# Altium PCB 04-ADC_antialiasing.PcbDoc
Units mm, origin at the board's own origin, x right, y up, seen from the top; angles counter-clockwise.
Board outline 58 x 60 mm, 2 copper layers (Top Layer, Bottom Layer), stack 1.534 mm thick; 43 components, 33 nets, 126 pads, 12 vias.
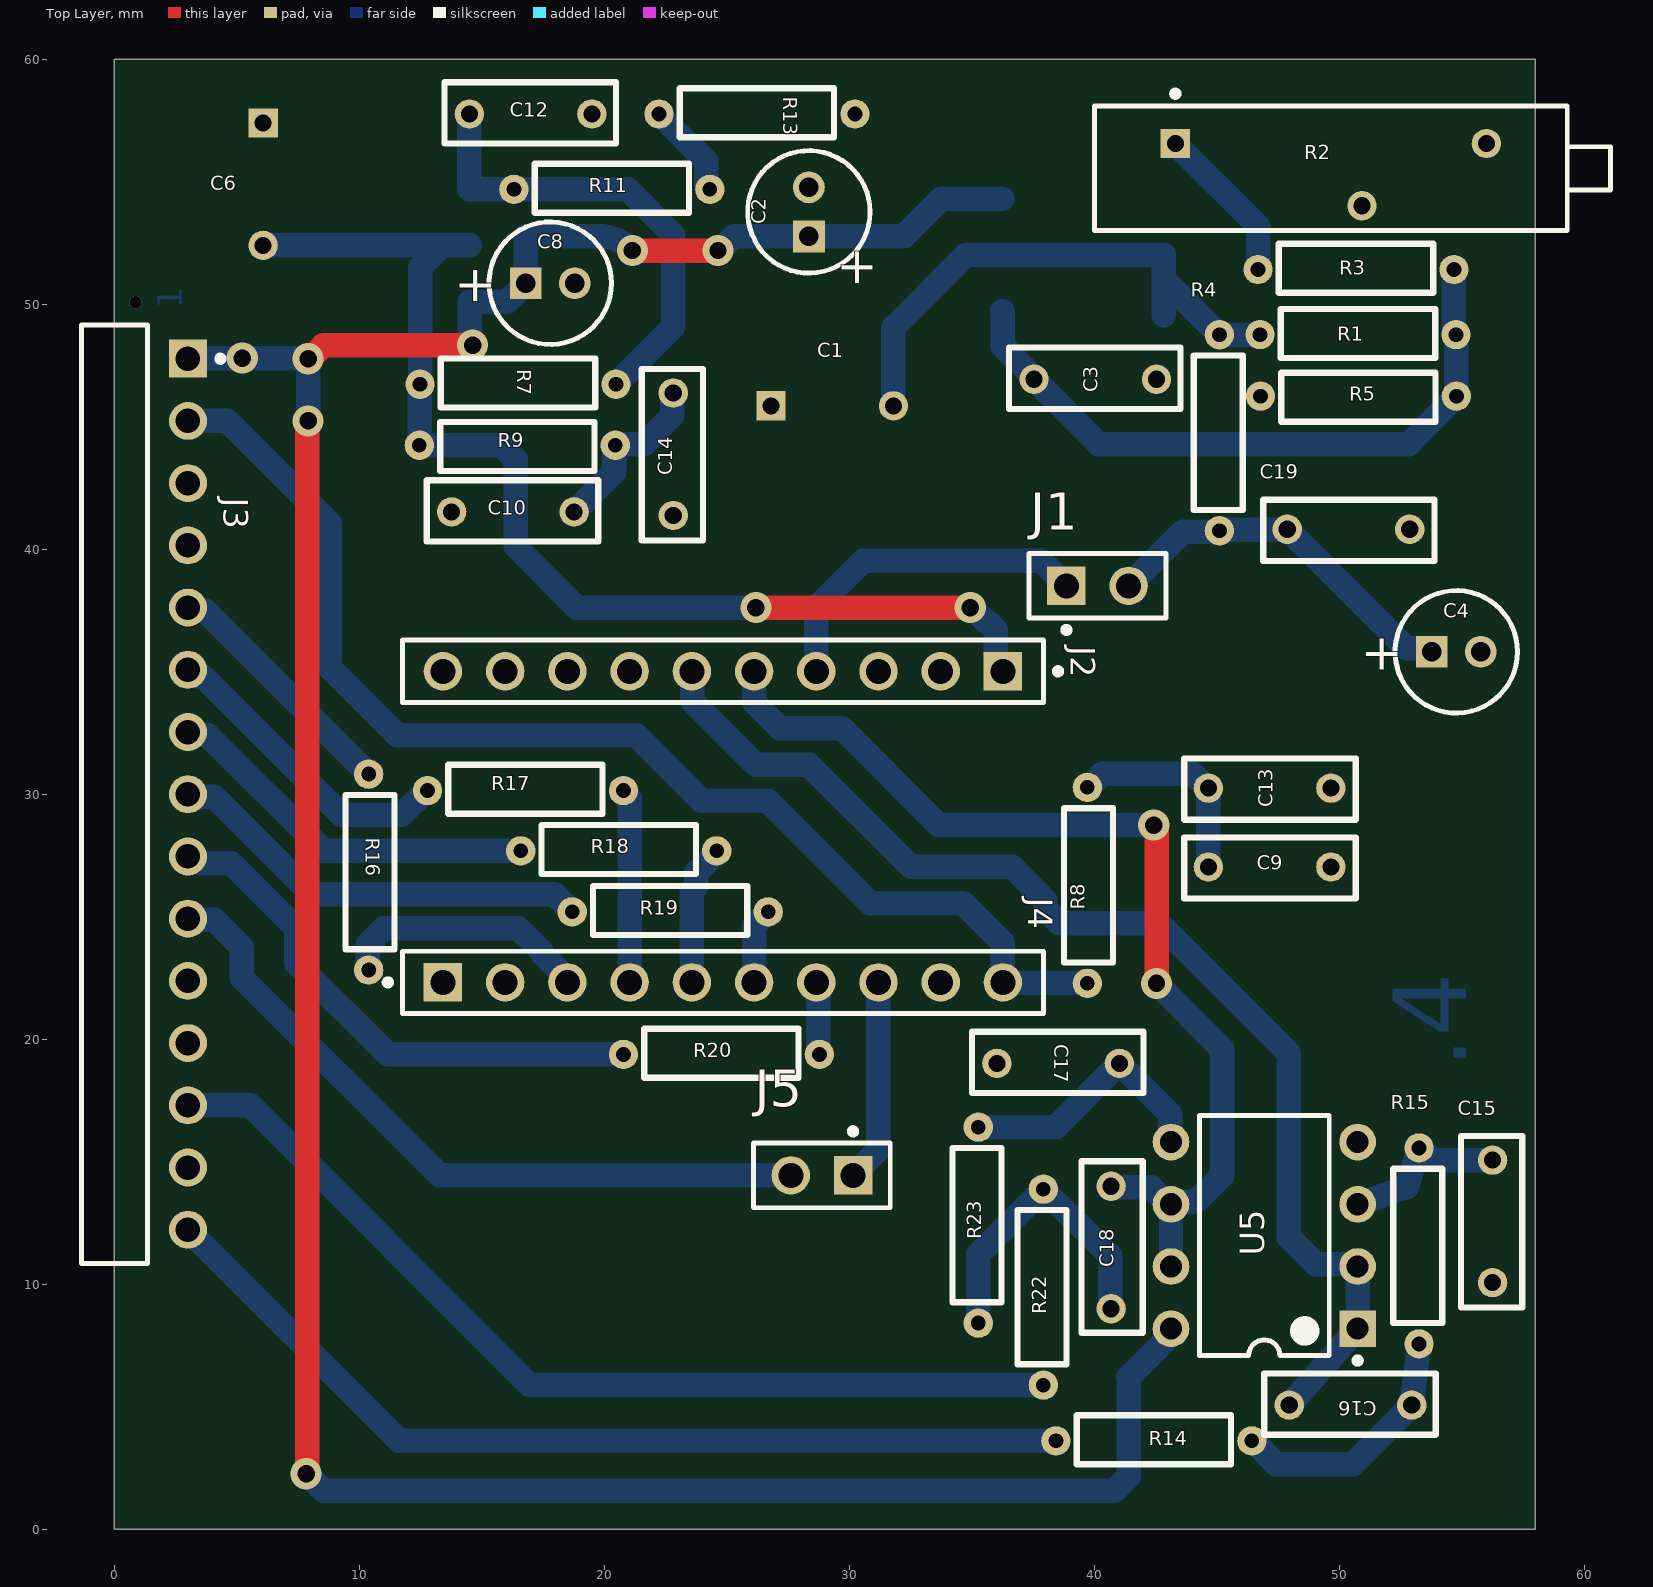
[diagram p0: Top Layer view]
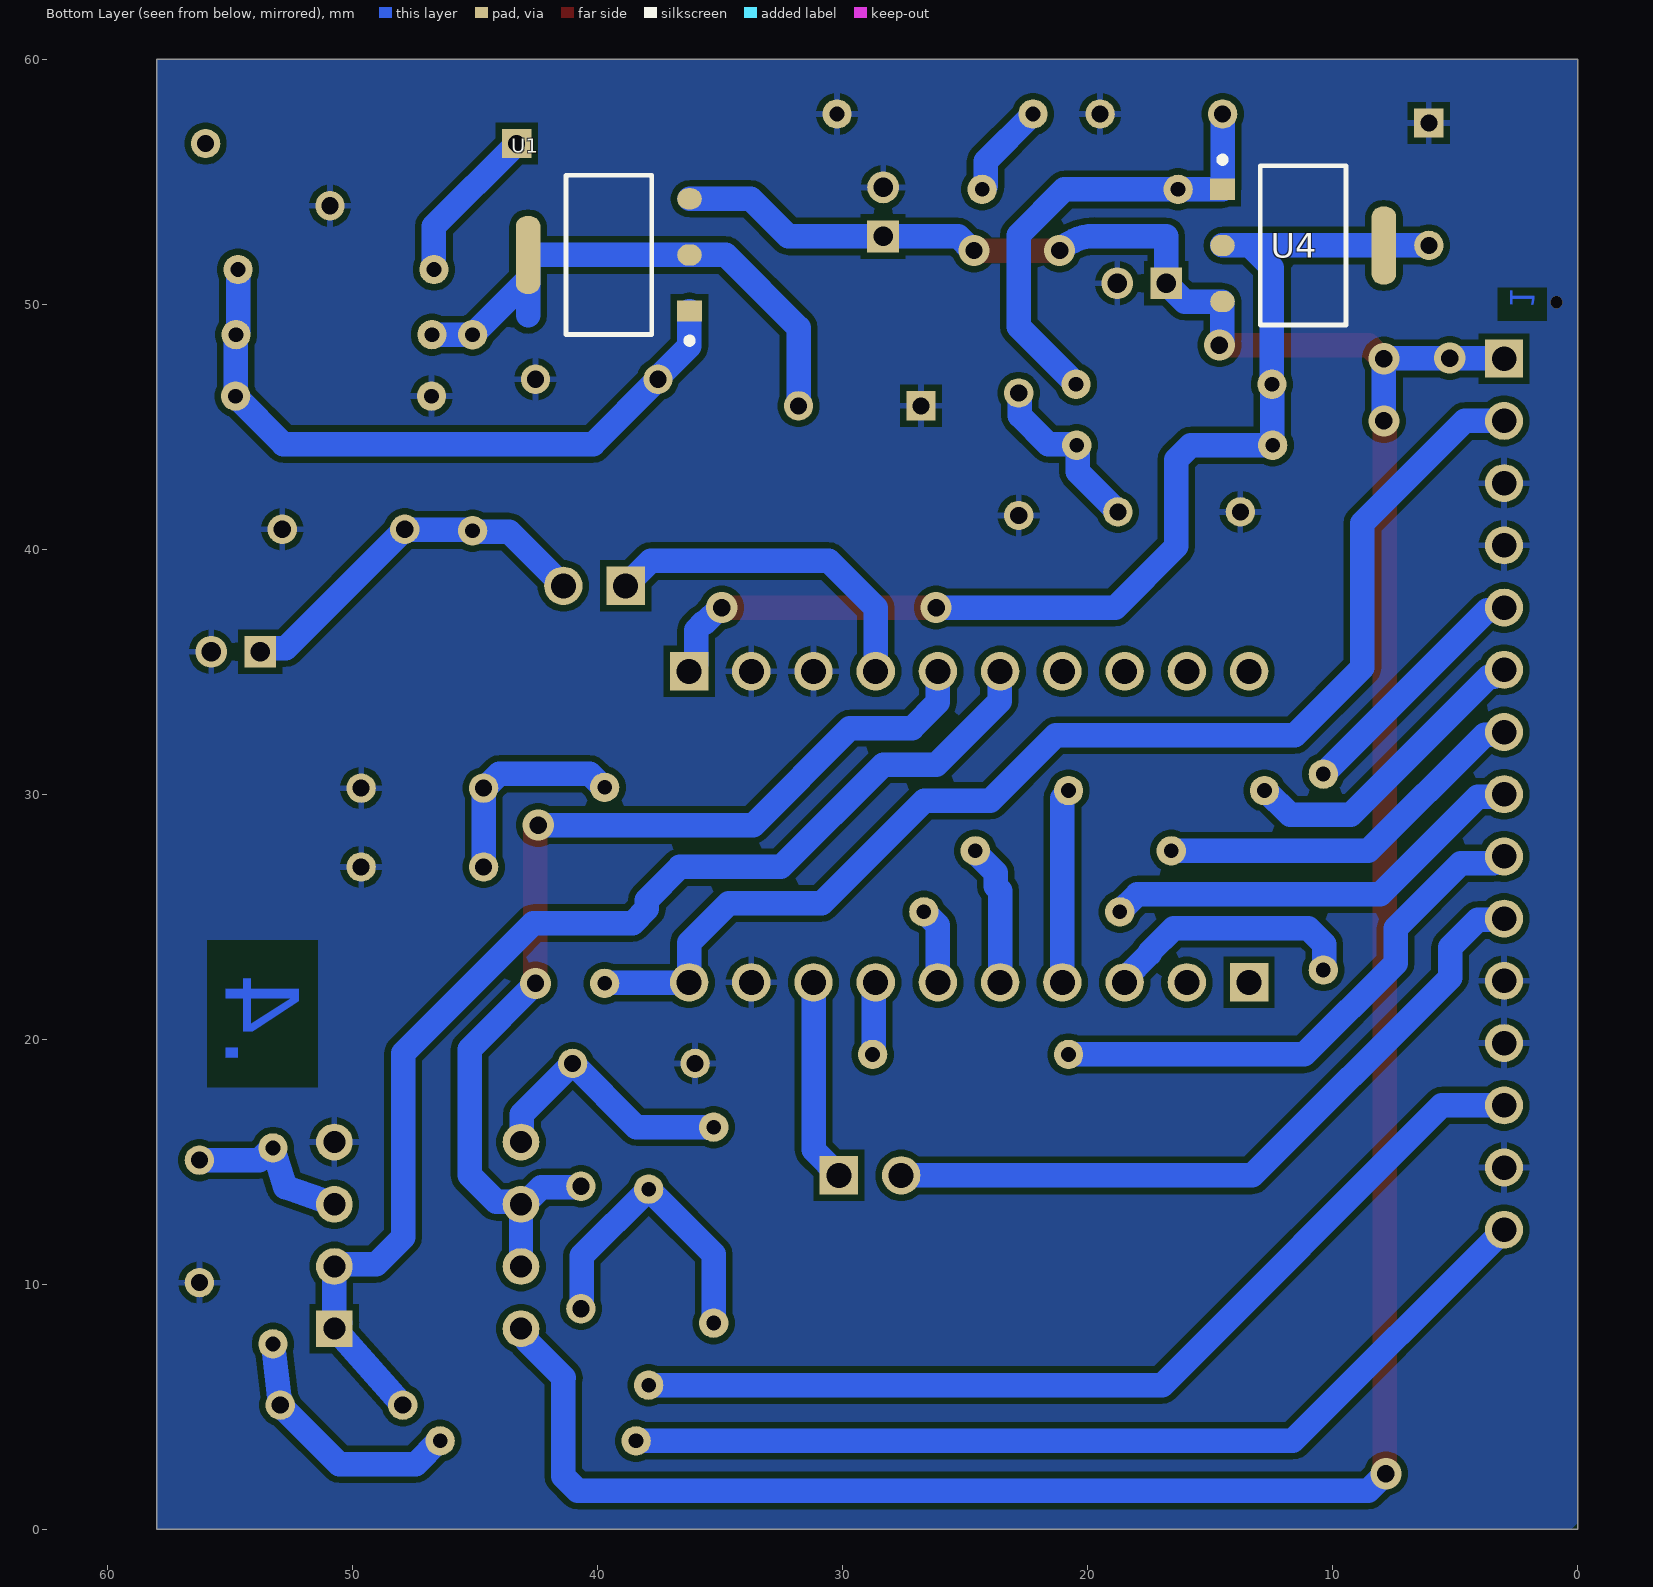
[diagram p1: Bottom Layer view, seen from below]

## Layer stack, top to bottom
Top Solder: solder mask 0.0127, Solder Resist, Dk 3.3
Top Layer: signal copper 0.0178
Dielectric1: core 1.4986, FR-4, Dk 4.3
Bottom Layer: signal copper 0.0178
Bottom Solder: solder mask 0.0127, Solder Resist, Dk 3.3

## Board outline
0,0 0,60 58,60 58,0

## Design rules (kind name [scope] priority, off if disabled: settings)
Clearance [All] p1: gap=0.254 ignorepadtopadclearanceinfootprint=FALSE except(0.1: Arc-Arc Arc-Track Arc-SMDPad Track-Track Track-SMDPad SMDPad-SMDPad)
DiffPairsRouting [All] p1: maxlimit=0.254 minlimit=0.254 mostfreqgap=0.254 toplayer_minwidth=0.254 toplayer_maxwidth=0.254 toplayer_prefwidth=0.254 bottomlayer_minwidth=0.254 bottomlayer_maxwidth=0.254 bottomlayer_prefwidth=0.254 maxuncoupledlength=12.7
HoleSize [All] p1: absolutevalues=TRUE maxlimit=7.62 minlimit=0.254 maxpercent=80.000 minpercent=20.000
MinimumAnnularRing [All] p1: minimumring=0.25
PasteMaskExpansion [All] p1: expansion=0.254
PlaneClearance [All] p1: clearance=0.381
PlaneConnect [All] p1: pad.planeconnectstyle=Relief pad.reliefexpansion=0.508 pad.reliefentries=4 pad.reliefconductorwidth=0.254 pad.reliefairgap=0.254 via.planeconnectstyle=Direct via.reliefexpansion=0.508 via.reliefentries=4 via.reliefconductorwidth=0.254 via.reliefairgap=0.254
PolygonConnect [All] p1: thpad.connectstyle=Relief thpad.reliefconductorwidth=0.254 thpad.reliefentries=4 thpad.polygonreliefangle="90 Angle" thpad.airgapwidth=0.254 smdpad.connectstyle=Relief smdpad.reliefconductorwidth=0.254 smdpad.reliefentries=4 smdpad.polygonreliefangle="90 Angle" smdpad.airgapwidth=0.254 via.connectstyle=Direct via.reliefconductorwidth=0.254 via.reliefentries=4 via.polygonreliefangle="90 Angle" via.airgapwidth=0.254
RoomDefinition 04-ADC_antialiasing [InComponentClass('04-ADC_antialiasing')] p1: confinementstyle=ConfineIn formatcopy=TRUE lockcomponents=FALSE outline -189.586,-112.446 -138.786,-112.446 -138.786,-87.046 -189.586,-87.046
RoutingVias [All] p1: holewidth=0.254 width=0.508 viastyle="Through Hole" minholewidth=0.25 minwidth=0.508 maxholewidth=0.254 maxwidth=0.508
SMDNeckDown [All] p1: percent=200.000
SilkToSolderMaskClearance SilkscreenOverComponentPads [IsPad] p1: minsilkscreentomaskgap=0.254 clearancetoexposedcopper=TRUE
SolderMaskExpansion [All] p1: expansion=0.254 istentingtop=FALSE
SupplyNets "Schematic Supply Nets_1" [InNet('GND')] p1: voltage=0.000
Width [All] p1: maxlimit=2 minlimit=0.254 preferedwidth=1 minimp=50.000000 maximp=50.000000 favimp=50.000000
24 further rules are at their usual default settings.

## Components (designator, comment, footprint, x,y, rotation, side; value= is the part's Value field where it differs from the comment)
C1 "Cap_Pol" Cap_Pol_1cm_5mmPads_15mmmHigh 31.804,45.856 r180 top value=220uF
C2 "ECA1HM100" CAPPR55-200-1100X500X1200 28.35,53.774 r90 top
C3 "Cap_6.0*2.5*6mm" Cap_6.0%2A2.5%2A6mm 37.542,46.94 r0 top value=100nF
C4 "ECA1HM100" CAPPR55-200-1100X500X1200 54.781,35.814 r0 top
C6 "Cap_Pol" Cap_Pol_1cm_5mmPads_15mmmHigh 6.071,52.404 r90 top value=220uF
C8 "ECA1HM100" CAPPR55-200-1100X500X1200 17.79,50.862 r0 top
C9 "Cap_5.0*2.5*6mm" Cap_6.0%2A2.5%2A6mm 49.659,27.029 r180 top value=100nF
C10 "Cap_5.0*2.5*6mm" Cap_6.0%2A2.5%2A6mm 13.765,41.525 r0 top value=100nF
C12 "Cap_6.0*2.5*6mm" Cap_6.0%2A2.5%2A6mm 14.492,57.77 r0 top value=100nF
C13 "Cap_5.0*2.5*6mm" Cap_6.0%2A2.5%2A6mm 49.659,30.248 r180 top value=100nF
C14 "Cap_5.0*2.5*6mm" Cap_6.0%2A2.5%2A6mm 22.815,41.38 r90 top value=100nF
C15 "Cap_6.0*2.5*6mm" Cap_6.0%2A2.5%2A6mm 56.263,10.061 r90 top value=330pF
C16 "Cap_6.0*2.5*6mm" Cap_6.0%2A2.5%2A6mm 47.961,5.06 r0 top value=1nF
C17 "Cap_6.0*2.5*6mm" Cap_6.0%2A2.5%2A6mm 36.026,19.011 r0 top value=330pF
C18 "Cap_6.0*2.5*6mm" Cap_6.0%2A2.5%2A6mm 40.687,13.996 r270 top value=1nF
C19 "Cap_5.0*2.5*6mm" Cap_6.0%2A2.5%2A6mm 52.879,40.816 r180 top value=100nF
J1 "M20-9990245" FP-M20-9990245-MFG 40.132,38.506 r0 top
J2 "SSQ-110-03-G-S" FP-SSQ-110-03-G-S-MFG 24.842,35.019 r180 top
J3 "90121-0775" FP-90121-0775-MFG 0,30 r270 top
J4 "SSQ-110-03-G-S" FP-SSQ-110-03-G-S-MFG 24.842,22.319 r0 top
J5 "M20-9990245" FP-M20-9990245-MFG 28.883,14.438 r180 top
R1 "Res_3.5x6.5mm_TH" Res_Axial_3.5x6.5mm_TH 46.768,48.764 r0 top value=2.2k
R2 "3006P-1-104LF" FP-3006P-1-104LF-MFG 50.546,55.55 r0 top
R3 "Res_3.5x6.5mm_TH" Res_Axial_3.5x6.5mm_TH 46.686,51.421 r0 top value=8.2k
R4 "Res_3.5x6.5mm_TH" Res_Axial_3.5x6.5mm_TH 45.11,40.759 r90 top value=10k
R5 "Res_3.5x6.5mm_TH" Res_Axial_3.5x6.5mm_TH 54.787,46.253 r180 top value=4.7k
R7 "Res_3.5x6.5mm_TH" Res_Axial_3.5x6.5mm_TH 12.475,46.737 r0 top value=220
R8 "Res_3.5x6.5mm_TH" Res_Axial_3.5x6.5mm_TH 39.72,30.279 r270 top value=10ohm
R9 "Res_3.5x6.5mm_TH" Res_Axial_3.5x6.5mm_TH 20.447,44.247 r180 top value=10ohm
R11 "Res_3.5x6.5mm_TH" Res_Axial_3.5x6.5mm_TH 16.309,54.693 r0 top value=270
R13 "Res_3.5x6.5mm_TH" Res_Axial_3.5x6.5mm_TH 22.231,57.77 r0 top value=100
R14 "Res_3.5x6.5mm_TH" Res_Axial_3.5x6.5mm_TH 38.436,3.601 r0 top value=10k
R15 "Res_3.5x6.5mm_TH" Res_Axial_3.5x6.5mm_TH 53.26,7.559 r90 top value=22K
R16 "Res_3.5x6.5mm_TH" Res_Axial_3.5x6.5mm_TH 10.379,30.823 r270 top value=1k
R17 "Res_3.5x6.5mm_TH" Res_Axial_3.5x6.5mm_TH 12.78,30.15 r0 top value=1k
R18 "Res_3.5x6.5mm_TH" Res_Axial_3.5x6.5mm_TH 16.587,27.689 r0 top value=1k
R19 "Res_3.5x6.5mm_TH" Res_Axial_3.5x6.5mm_TH 18.688,25.198 r0 top value=1k
R20 "Res_3.5x6.5mm_TH" Res_Axial_3.5x6.5mm_TH 20.78,19.376 r0 top value=1k
R22 "Res_3.5x6.5mm_TH" Res_Axial_3.5x6.5mm_TH 37.922,5.877 r90 top value=10k
R23 "Res_3.5x6.5mm_TH" Res_Axial_3.5x6.5mm_TH 35.267,8.409 r90 top value=22k
U1 "ams1117" FP-ams1117-IPC_C 39.549,52.016 r0 bottom
U4 "ams1117" FP-ams1117-IPC_C 11.201,52.403 r180 bottom
U5 "MCP6022-I/P" PDIP300-P8 46.944,11.99 r180 top

## Footprints (in the part's own frame and the unit in brackets; to place one, negate y for a bottom-side part, rotate by r counter-clockwise, add the part's x,y. Pads: shape width x height; smd on the part's side, far side on the other; paste and mask are expansions set on the pad)
Cap_6.0%2A2.5%2A6mm [mm]
  round 1.2 hole 0.7: 1(0,0) 2(5,0)
  silkscreen extent -1.02,-1.21 5.98,1.29, body extent -1.02,-1.21 5.98,1.29, height 6
Cap_Pol_1cm_5mmPads_15mmmHigh [mm]
  round 1.2 hole 0.7: 0(0,0)
  rect 1.2x1.2 hole 0.7: 1(5,0)
  body extent -2.57,-4.92 7.43,5.08, height 20
CAPPR55-200-1100X500X1200 [mm] "THD, 2-Leads, Dia 5mm, Body Length 11mm"
  rect 1.3x1.3 hole 0.8: 1(-1,0)
  round 1.3 hole 0.8: 2(1,0)
  silkscreen extent -2.5,-2.5 2.5,2.5, body extent -2.5,-2.5 2.5,2.5, height 12
FP-3006P-1-104LF-MFG [mm]
  rect 1.2x1.2 hole 0.7 paste-2539.97 mask+0: 1(-7.235,1.015)
  round 1.2 hole 0.7 paste-2539.97 mask+0: 2(0.385,-1.525) 3(5.465,1.015)
  silkscreen extent -10.54,-2.54 10.54,3.17, body extent -10.64,-2.64 10.64,2.64, height 0.25
FP-90121-0775-MFG [mm]
  rect 1.55x1.55 hole 1 paste-2539.97 mask+0: 1(-17.78,3)
  round 1.55 hole 1 paste-2539.97 mask+0: 2(-15.24,3) 3(-12.7,3) 4(-10.16,3) 5(-7.62,3) 6(-5.08,3) 7(-2.54,3) 8(0,3) 9(2.54,3) 10(5.08,3) 11(7.62,3) 12(10.16,3) 13(12.7,3) 14(15.24,3) 15(17.78,3)
  silkscreen extent -19.15,-1.35 19.15,4.45, body extent -19.25,-8.4 19.25,3.88, height 0.25
FP-ams1117-IPC_C [mm]
  rect 1.004x0.872 smd paste+0 mask+0: 1(-3.295,2.29)
  rrect100% 1.004x0.872 smd paste+0 mask+0: 2(-3.295,0) 3(-3.295,-2.29)
  rrect87% 1.004x3.182 smd paste+0 mask+0: 4(3.295,0)
  silkscreen extent -3.42,-3.25 1.75,3.62, body extent -3.5,-3.25 3.5,3.25, height 1.8
FP-M20-9990245-MFG [mm]
  rect 1.57x1.57 hole 1.02 paste-2539.97 mask+0: 1(-1.27,0)
  round 1.57 hole 1.02 paste-2539.97 mask+0: 2(1.27,0)
  silkscreen extent -2.79,-1.92 2.79,1.32, body extent -2.89,-1.42 2.89,1.42, height 0.25
FP-SSQ-110-03-G-S-MFG [mm]
  rect 1.57x1.57 hole 1.02 paste-2539.97 mask+0: 1(-11.43,0)
  round 1.57 hole 1.02 paste-2539.97 mask+0: 2(-8.89,0) 3(-6.35,0) 4(-3.81,0) 5(-1.27,0) 6(1.27,0) 7(3.81,0) 8(6.35,0) 9(8.89,0) 10(11.43,0)
  silkscreen extent -13.81,-1.27 13.08,1.27, body extent -13.18,-1.37 13.18,1.37, height 0.25
PDIP300-P8 [mm] "8-Pin Plastic Dual In-Line Package (PDIP)"
  rect 1.5x1.5 hole 0.9: 1(-3.81,3.81)
  round 1.5 hole 0.9: 2(-3.81,1.27) 3(-3.81,-1.27) 4(-3.81,-3.81) 5(3.81,-3.81) 6(3.81,-1.27) 7(3.81,1.27) 8(3.81,3.81)
  silkscreen extent -3.94,-4.9 2.65,5.23, body extent -3.55,-4.9 3.55,4.9, height 4.32
Res_Axial_3.5x6.5mm_TH [mm]
  round 1.2 hole 0.6: 0(0,0) 1(8,0)
  silkscreen extent 0.85,-0.95 7.15,1.05, body extent 0.85,-1 7.15,1, height 2.1

## Part data
C2 C4 C8: library part CMP-1665-00038-2, "Aluminum Electrolytic Capacitor, 10 uF, +/- 20%, 50 V, -40 to 85 degC, 2-Pin THD, RoHS, Bulk", Capacitance=10uF, Case/Package=Radial, Dielectric Material=Aluminium, Leakage Current=3uA, Manufacturer=Panasonic, Max Operating Temperature=85degC, Min Operating Temperature=-40degC, Package Description="2-Pin Radial Lead, Dia 5 mm, Height 12 mm", Package Quantity=200, Package Reference=CAPPR55-200-1100X500X1200, Ripple Current=65mA, Tolerance=20%, Voltage=50V, Datasheet URL=https://industrial.panasonic.com/cdbs/www-data/pdf/RDF0000/ABA0000C1218.pdf, Datasheet Version="Rev. 05, 10/2016", Diameter=5mm, Dissipation Factor=0.12%, Height=11mm, Height - Seated (Max)=0.472inch, Lead Diameter=0.5mm, Lead Free=LeadFree, Lead Pitch=2mm, Lead/Base Style=Straight, Length=11mm, Life (Hours)=2000Hour, Manufacturer URL=http://www.panasonic.com/, Mount=ThroughHole, Number of Pins=2, Packaging=Bulk, Radiation Hardening=No, REACH SVHC=NoSVHC, Ripple Current (AC)=65mA, RoHSCompliant=true, Termination=Radial, Voltage Rating=50V, Voltage Rating (DC)=50V
C9 C10 C13 C14 C19: library part Cap_6.0*2.5*6mm
J1 J5: library part CMP-15831-000105-1, "CONN HEADER VERT 2POS 2.54MM", Case/Package=SIL, Color=Black, Contact Resistance=25mR, Current=3A, Flammability Rating="UL94 V-0", Insulation Resistance=10GR, Max Operating Temperature=105°C, Min Operating Temperature=-40°C, Package Quantity=1000, Voltage=50V, Voltage Rating (AC)=750V, Connector Type="Male Pin", Contact Finish - Mating=GOLD, Contact Material=Brass, Contact Mating Length=0.24inch, Contact Plating=Gold, Contact Shape=Square, Contact Type="Male Pin", Current Rating=3A, Depth=2.54mm, Fastening Type=Pull, Gender=Male, Height=0.12inch, Housing Color=Black, Housing Material=Nylon, Insulation Color=Black, Insulation Material=Nylon, Lead Pitch=2.54mm, Length=5.08mm, Mated Stacking Heights=16.54mm, Mating Cycles=300, Max Current Rating=3A, Mount="Through Hole", Number of Contacts=2, Number of Poles=2, Number of Positions=2, Number of Rows=1, Orientation=Straight, Packaging=Bulk, Pitch=2.54mm, Radiation Hardening=No, Reach SVHC Compliant=Yes, Series=M20, Termination=Solder, Weight=0.25lb, Width=0.25inch, Working Voltage=750V
J2 J4: library part CMP-02766-001399-1, "CONN RCPT 10POS 0.1 GOLD PCB", Color=Black, Connector Type=Receptacle, Contact Material=Bronze, Contact Plating=Gold, Contact Type="Female Socket", Gender=Receptacle, Height=8.51mm, Housing Color=Black, Housing Material=Plastic, Lead Free="Lead Free", Length=25.9mm, Mount="Through Hole", Number of Contacts=10, Number of Positions=10, Number of Rows=1, Packaging=Bulk, Pitch=0.1inch, Radiation Hardening=No, REACH SVHC="No SVHC", RoHS Compliant=Yes, Series=SSQ, System=Connector, Termination=Solder, Width=2.41mm
J3: library part CMP-04776-000577-1, "CGRID SR RA PN 675290MM AUE 15CK", Contact Resistance=20mR, Current Rating=3A, Insulation Resistance=5GR, Max Operating Temperature=125°C, Min Operating Temperature=-55°C, Package Quantity=900, Voltage Rating=350V, Contact Material=Brass, Contact Plating=Gold, Gender=Male, Glow Wire Compliant=Non-compliant, Housing Material=Polyester, Lead Pitch=2.54mm, Material=Glass, Mount="Through Hole", Number of Circuits=14, Number of Contacts=15, Number of Poles=15, Number of Positions=15, Number of Rows=1, Orientation="Right Angle", Packaging=Tray, Pitch=2.54mm, Radiation Hardening=No, Series="C-Grid III", System=Connector, Termination="Through Hole", Voltage Rating (AC)=350V, Working Voltage=350V
R2: library part CMP-07234-000037-1, "TRIMMER 100K OHM 0.75W PC PIN", Color=Blue, Insulation Resistance=1GR, Manufacturer Series=3006, Max Operating Temperature=125°C, Max Power Dissipation=750mW, Min Operating Temperature=-55°C, Package Quantity=100, Resistance=5k, Resistance Law=Linear, Resistance Tolerance=10%, Resistor Type=Cermet, Temperature Coefficient=100ppm/°C, Actuator Orientation=Horizontal, Actuator Type=SCREW, Depth=4.83mm, Height=6.35mm, Lead Free="Contains Lead", Length=20.57mm, Military Standard=Not, Mount="Through Hole", Number of Pins=3, Number of Terminals/Pins=3, Number of Turns=15, Packaging=Rail/Tube, Pin Diameter=0.6mm, Pitch=2.5mm, Power Rating=750mW, Radiation Hardening=No, REACH SVHC="No SVHC", RoHS Compliant=Yes, Series=3006, Taper=Linear, Technology=CERMET, Terminal Finish=Tin, Termination=Pin, Thickness=5.59mm, Tolerance=10%, Type=Potentiometer, Weight=0.04oz, Width=4.83mm
U1 U4: library part CMP-209535-000002-1, "1A LOW DROPOUT VOLTAGE REGULATOR", RoHS Compliant=Yes
U5: library part CMP-0187-00094-3, "None", Case/Package=PDIP, Input Bias Current=150pA, Input Offset Voltage (Vos)=500uV, Max Frequency=10kHz, Max Input Voltage=5.8V, Max Operating Temperature=85°C, Max Output Current=30mA, Max Supply Current=2mA, Max Supply Voltage=5.5V, Min Input Voltage=-300mV, Min Operating Temperature=-40°C, Min Supply Voltage=2.5V, Nominal Supply Current=1mA, Output Current=22mA, Package Quantity=60, Power Supply Rejection Ratio (PSRR)=74dB, Voltage Gain=110dB, Amplifier Type="GENERAL PURPOSE", Bandwidth=10MHz, Common Mode Rejection Ratio=70dB, Gain Bandwidth Product=10MHz, Height=0.195inch, Input Offset Voltage-Max=500uV, Lead Free="Lead Free", Lead Pitch=2.54mm, Length=0.4inch, Mount="Through Hole", Number of Amplifiers=2, Number of Channels=2, Number of Circuits=2, Number of Elements=2, Number of Pins=8, Packaging=Rail/Tube, Radiation Hardening=No, REACH SVHC="No SVHC", RoHS Compliant=Yes, Row Spacing=9.4mm, Settling Time=250ns, Slew Rate=7V/µs, Slew Rate-Nom=7V/µs, Supply Current=1mA, Technology=CMOS, Unity Gain Bandwidth Product=10MHz, Width=0.28inch

## Via types
v1: diameter 1.27, hole 0.711, Top Layer to Bottom Layer, 11 vias
v2: diameter 0.5, hole 0.5, Top Layer to Bottom Layer, 1 vias

## Nets (pads, with @x,y where several pads share a name; then routed paths per layer and width w, separated by ;. In a path a pad name is that pad's centre, name@x,y a point inside that pad or via, vN(x,y) a via of type N, cw(c..) or ccw(c..) an arc to the next point about the centre after c; other vN are vias at no path point)
3V3_POWER_ANALOG: C6.0 J2.1 R7.0 R9.1 U4.2 U4.4 | length 47.5
  Top Layer w1: v1(26.189,37.62) v1(34.937,37.62)
  Bottom Layer w1: C6.0@6.071,52.403 U4.4 ; U4.4 13.383,52.403 ; U4.2 13.383,52.403 ; v1(26.189,37.62) 18.873,37.62 16.379,40.114 16.379,43.661 15.793,44.247 R9.1 12.461,44.261 12.461,46.723 R7.0 12.475,51.494 13.383,52.403 ; v1(34.937,37.62) 35.01,37.62 35.625,37.005 35.686,37.005 35.987,36.704 35.987,35.304 J2.1
3V3_POWER_DIGITAL: J3.2 J4.10 R8.1 | length 50.6
  Bottom Layer w1: J3.2 4.605,45.24 8.782,41.063 8.782,35.165 11.543,32.405 21.301,32.405 23.972,29.733 26.68,29.733 30.861,25.552 34.657,25.552 36.272,23.938 J4.10 36.291,22.299 39.7,22.299 R8.1
5V: C2.1 C8.1 J3.1 U1.3 U4.3 U5.8 | length 125.1
  Top Layer w1: v1(7.823,2.261) 7.865,2.302 7.865,45.198 v1(7.906,45.24) ; v1(7.906,47.78) 7.979,47.78 8.534,48.335 v1@14.548,48.335 ; v1(21.145,52.197) v1(24.639,52.197)
  Bottom Layer w1: J3.1 3.012,47.792 5.205,47.792 v1(5.217,47.803) 5.228,47.792 7.894,47.792 v1(7.906,47.78) v1(7.906,45.24) ; v1(7.823,2.261) 7.856,2.261 8.544,1.573 40.823,1.573 41.409,2.158 41.409,6.147 41.382,6.174 42.884,7.676 42.884,7.795 43.134,8.045 U5.8 ; v1(14.621,48.335) 14.621,48.408 14.499,48.531 14.499,50.111 U4.3 16.041,50.113 C8.1 16.79,52.783 19.728,52.783 cw(c19.728,50.78) v1(21.145,52.197) ; v1(24.639,52.197) 24.712,52.197 25.289,52.774 C2.1 32.214,52.774 33.747,54.306 U1.3
ADC_CK: J3.6 R17.0 | length 12.6
  Bottom Layer w1: J3.6 3.149,35.08 3.424,34.805 3.625,34.805 9.268,29.162 11.738,29.162 12.726,30.15 R17.0
ADC_CS: J3.5 R16.0 | length 10.2
  Bottom Layer w1: J3.5 3.105,37.515 3.687,37.515 R16.0@10.359,30.843
ADC_DI: J3.7 R18.0 | length 15.6
  Bottom Layer w1: J3.7 3.105,32.435 3.797,32.435 8.543,27.689 R18.0
ADC_DO: J3.8 R19.0 | length 17.7
  Bottom Layer w1: J3.8 3.105,29.895 4.08,29.895 8.055,25.92 17.966,25.92 R19.0
ADC_IRQ/MDAT: J3.9 R20.0 | length 22
  Bottom Layer w1: J3.9 3.149,27.46 3.424,27.185 4.767,27.185 7.429,24.523 7.429,23.097 11.15,19.376 R20.0
ADC_MCLK: J3.10 J5.2 | length 29.7
  Bottom Layer w1: J3.10 3.052,24.868 4.08,24.868 5.205,23.744 5.205,22.515 13.282,14.438 J5.2
CLOCK: J4.8 J5.1 | length 8.3
  Bottom Layer w1: J5.1 31.192,15.477 J4.8
EXTERNAL_REFIN+: C4.1 C19.2 J1.2 R4.0 | length 15.4
  Bottom Layer w1: J1.2 43.616,40.721 45.072,40.721 R4.0 45.139,40.788 47.85,40.788 C19.2 ; C19.2@47.914,40.781 52.731,35.964 53.631,35.964 C4.1
Filter_AA_ADC1: C18.1 J2.5 U5.6 U5.7 | length 43.1
  Top Layer w1: v1@42.402,28.768 v1(42.43,28.739) 42.43,28.666 42.542,28.555 v1(42.542,22.279)
  Bottom Layer w1: J2.5 26.112,33.749 27.171,32.69 29.707,32.69 33.657,28.739 v1(42.43,28.739) ; C18.1@40.725,14.034 C18.1 40.725,13.957 42.301,13.957 42.998,13.26 U5.6 ; v1(42.542,22.279) 45.232,19.59 45.232,14.438 44.15,13.356 43.229,13.356 U5.6 ; U5.7 U5.6
Filter_AA_ADC2: C16.1 J2.6 U5.1 U5.2 | length 49.9
  Bottom Layer w1: J2.6 23.586,35.004 23.586,33.802 26.189,31.2 28.35,31.2 32.521,27.029 36.644,27.029 37.994,25.68 37.994,25.327 38.58,24.741 42.635,24.741 47.95,19.427 47.95,11.913 49.047,10.816 50.658,10.816 U5.2 U5.1 ; C16.1 50.504,7.93 U5.1 ; U5.1@50.504,8.43 U5.1 ; U5.1@50.542,8.392 U5.1
GND: C1.1 C2.2 C3.2 C4.2 C6.1 C8.2 C9.1 C10.1 C12.2 C13.1 C14.1 C15.1 C17.1 C19.1 J2.2 J2.3 J3.3 J3.4 J3.11 J3.12 J3.14 J4.9 R2.2 R5.1 R13.1 U5.4
  other v2: 0.864,50.085
NetC9_2: C9.2 C13.2 R8.0 | length 8.6
  Bottom Layer w1: R8.0 39.774,30.279 40.328,30.834 44.019,30.834 44.604,30.248 C13.2 C9.2
NetC10_2: C10.2 C14.2 R9.0 | length 7.2
  Bottom Layer w1: C10.2@18.765,41.489 C10.2 20.409,43.168 20.409,44.209 R9.0 20.485,44.285 21.601,44.285 22.776,45.461 22.776,46.342 C14.2
NetC12_1: C12.1 R7.1 R11.0 U4.1 | length 19.2
  Bottom Layer w0.45: C12.1 C12.1@14.494,57.767 ; U4.1@14.494,54.695 U4.1
  Bottom Layer w1: U4.1@14.494,54.695 C12.1@14.494,57.767 ; U4.1 R11.0 20.952,54.693 22.815,52.83 22.815,49.077 R7.1
NetC15_2: C15.2 R15.1 U5.3 | length 7
  Bottom Layer w1: U5.3 52.758,13.961 R15.1 53.314,15.559 53.812,15.061 C15.2
NetC16_2: C16.2 R14.1 R15.0 | length 10.4
  Bottom Layer w1: R14.1 46.49,3.601 47.44,2.651 50.551,2.651 C16.2 R15.0
NetC17_2: C17.2 R23.1 U5.5 | length 10.9
  Bottom Layer w1: R23.1 38.425,16.409 C17.2 43.094,16.943 43.094,15.84 U5.5
NetC18_2: C18.2 R22.1 R23.0 | length 12.6
  Bottom Layer w1: R23.0 35.267,11.222 R22.1 40.649,11.15 40.649,9.034 C18.2
NetJ4_3: J4.3 R16.1 | length 10.5
  Bottom Layer w1: R16.1@10.343,22.823 10.343,23.875 10.991,24.523 16.492,24.523 17.475,23.541 17.475,23.49 18.492,22.473 J4.3
NetJ4_4: J4.4 R17.1 | length 7.9
  Bottom Layer w1: R17.1 20.78,30.096 21.032,29.845 J4.4
NetJ4_5: J4.5 R18.1 | length 5.8
  Bottom Layer w1: J4.5 23.572,26.065 23.754,26.248 23.754,26.802 24.587,27.635 R18.1
NetJ4_6: J4.6 R19.1 | length 3.1
  Bottom Layer w1: J4.6 26.112,24.648 26.661,25.198 R19.1
NetJ4_7: J4.7 R20.1 | length 3
  Bottom Layer w1: J4.7 28.742,22.229 28.742,19.415 R20.1
NetR2_1: R2.1 R3.0 | length 6.5
  Bottom Layer w1: R2.1 46.686,53.19 R3.0
NetR11_1: R11.1 R13.0 | length 3.9
  Bottom Layer w0.45: R11.1@24.166,54.836 R11.1
  Bottom Layer w1: R13.0 24.166,55.835 R11.1@24.166,54.836
REFIN+: J1.1 J2.4 | length 14
  Bottom Layer w1: J2.4 28.652,37.605 30.571,39.524 37.844,39.524 J1.1
Vin_ADC1: J3.13 R22.0 | length 39.7
  Bottom Layer w1: J3.13 5.535,17.3 16.958,5.877 R22.0
Vin_ADC2: J3.15 R14.0 | length 39
  Bottom Layer w1: J3.15 11.619,3.601 R14.0
VREF_3V3: C1.0 R1.0 R4.1 U1.2 U1.4 | length 22.7
  Bottom Layer w1: C1.0 31.804,49.048 34.773,52.016 U1.2 U1.4 U1.4@42.844,50.927 ; 42.844,49.553 U1.4@42.844,50.927 ; R1.0@46.763,48.759 R4.1 42.944,50.925 42.846,50.925 U1.4@42.844,50.927
VREF_3V3_ADJ: C3.1 R1.1 R3.1 R5.0 U1.1 | length 27.7
  Bottom Layer w1: U1.1 36.256,49.724 36.256,48.28 37.542,46.995 C3.1 40.185,44.298 52.831,44.298 R5.0 54.777,46.263 54.777,48.755 R1.1 54.768,48.818 54.686,48.9 R3.1
pads on no net: J2.7 J2.8 J2.9 J2.10 J4.1 J4.2 R2.3

## Polygon pours and split planes (outlines as drawn)
GND on Bottom Layer "GND_L02_P000" (solid, pour order 0): 0,0 0,60 58,60 58,0

## Other copper
Bottom Layer:
  text "1" at 2.758,49.829 h1 r90
  text ".4" at 55.186,18.796 h3 r90

## Silkscreen, mask and mechanical layers (free items; w line width, h text height)
Board:
  the board outline again, w0.254

## Text inside footprints (layer, text, board x,y; h text height)
C2: Top Overlay "+" at 30.95,50.645 h1.5 r90
C4: Top Overlay "+" at 50.873,35.077 h1.5
C8: Top Overlay "+" at 13.882,50.125 h1.5